# Altium PCB T-LOG v2.0.PcbDoc
Units mm, origin at the board's own origin, x right, y up, seen from the top; angles counter-clockwise.
Board outline 11.25 x 14.5 mm, 2 copper layers (TOP, BOTTOM), stack 0.136 mm thick; 18 components, 13 nets, 68 pads, 31 vias.
Unrouted connection lines stored in the file: 1.
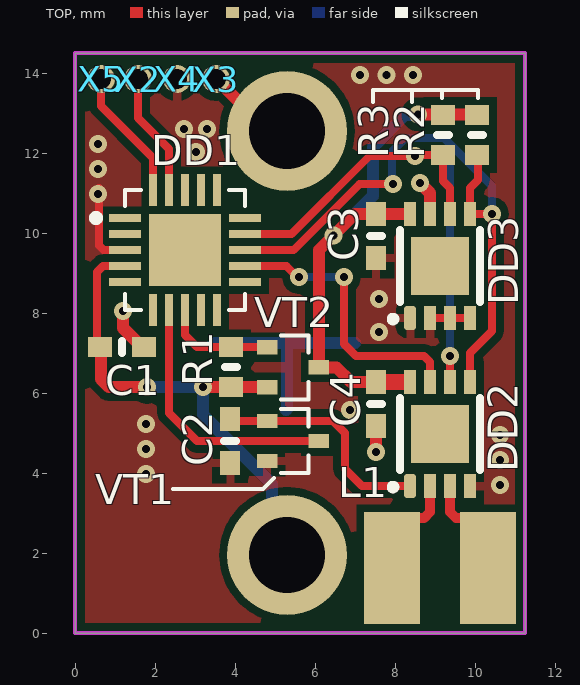
[diagram p0: TOP view]
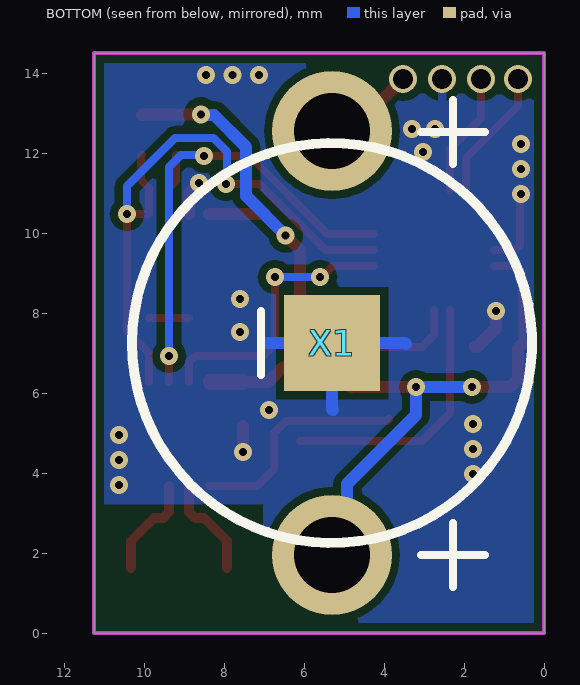
[diagram p1: BOTTOM view, seen from below]
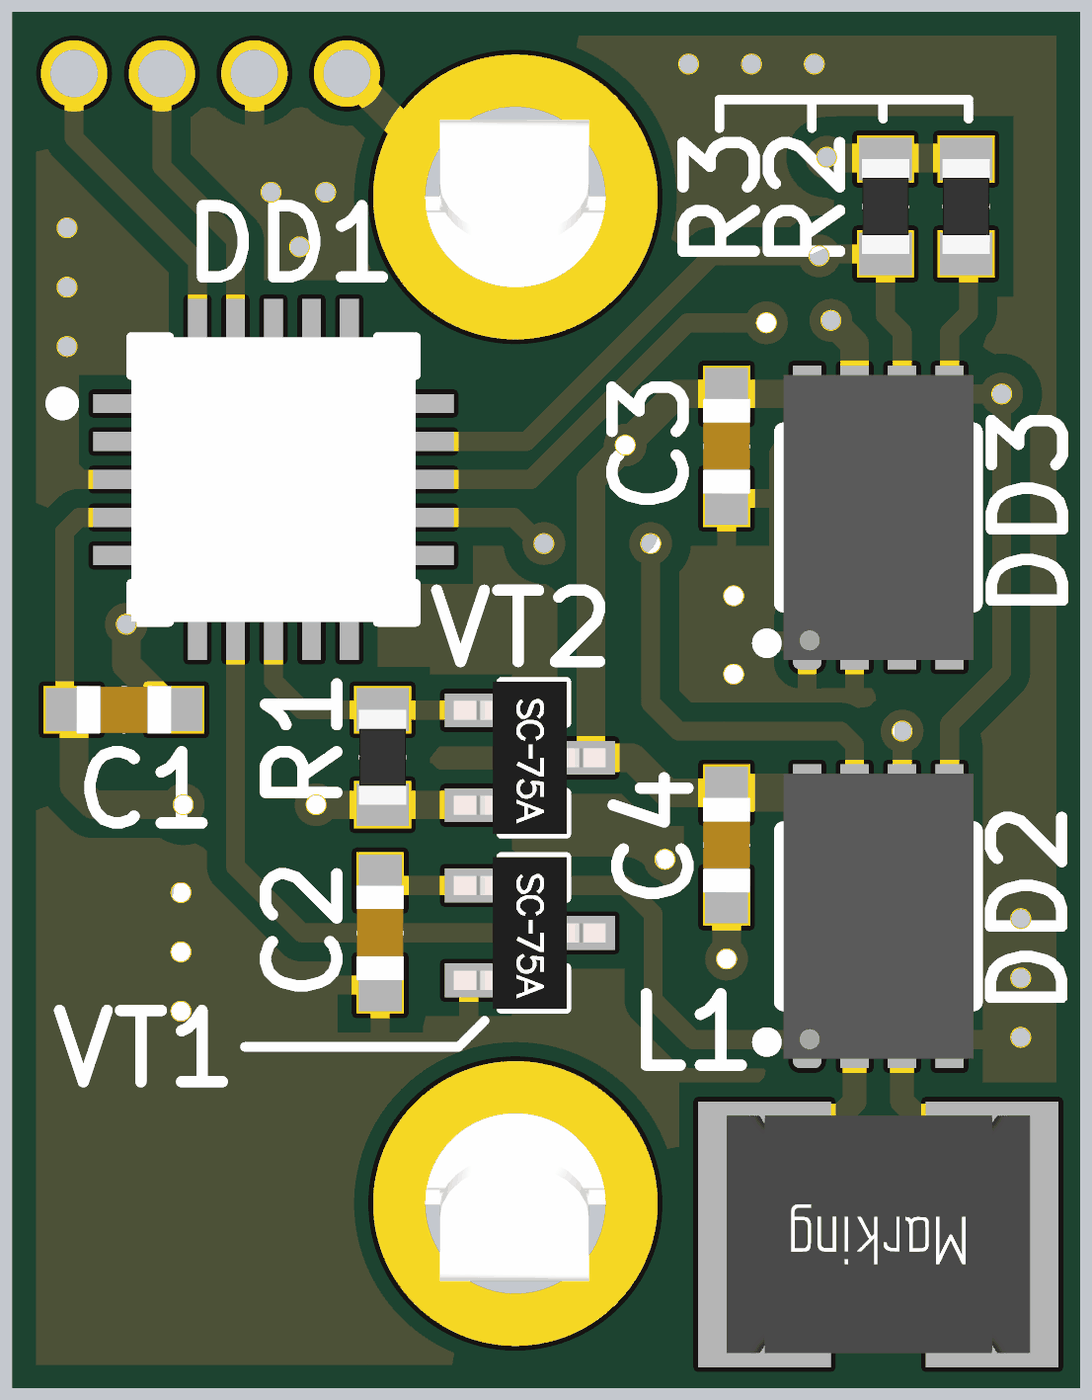
[diagram p2: 3D render of the assembled board from above, using the file's embedded part models]

## Layer stack, top to bottom
TopMask: solder mask 0.01, Solder Resist, Dk 3.5
TOP: signal copper 0.018
Dielectric 1: core 0.1, FR-4, Dk 4.2
BOTTOM: signal copper 0.018
BotMask: solder mask 0.01, Solder Resist, Dk 3.5

## Board outline
0,0 0,14.5 11.25,14.5 11.25,0

## Design rules (kind name [scope] priority, off if disabled: settings)
Clearance ClearancePOLY [InPoly] p1: gap=0.2 ignorepadtopadclearanceinfootprint=FALSE
Clearance ClearanceINNER [OnLayer('INNER1') OR OnLayer('INNER2')] p2: gap=0.15 ignorepadtopadclearanceinfootprint=FALSE
Clearance ClearanceTOPandBOTTOM [OnLayer('TOP') OR OnLayer('BOTTOM')] p3: gap=0.12 ignorepadtopadclearanceinfootprint=FALSE
Clearance POLY-BOARD [InPoly vs OnLayer('Keep-Out Layer')] p4: gap=0.5 ignorepadtopadclearanceinfootprint=FALSE
ComponentClearance [All] p1: gap=0 collisioncheckmode=3 verticalgap=0 showdistances=FALSE
DiffPairsRouting [All] p1: maxlimit=0.25 minlimit=0.1 mostfreqgap=0.125 toplayer_minwidth=0.125 toplayer_maxwidth=0.2 toplayer_prefwidth=0.125 bottomlayer_minwidth=0.125 bottomlayer_maxwidth=0.2 bottomlayer_prefwidth=0.125 maxuncoupledlength=5
HoleSize [All] p1: absolutevalues=TRUE maxlimit=5 minlimit=0.2 maxpercent=80.000 minpercent=20.000
HoleToHoleClearance [All] p1: gap=0.1 allowstackedmicrovias=TRUE
MinimumSolderMaskSliver [All] p1: minsoldermaskwidth=0.1
PlaneClearance [All] p1: clearance=0.5
PlaneConnect [All] p1: planeconnectstyle=Relief reliefexpansion=0.5 reliefentries=4 reliefconductorwidth=0.25 reliefairgap=0.25
PolygonConnect PolygonConnect_PAD_ANT [IsPad AND (InComponent('ANT1') OR InComponent('C14'))] p1: connectstyle=Relief reliefconductorwidth=0.2 reliefentries=4 polygonreliefangle="90 Angle" airgapwidth=0.125
PolygonConnect PolygonConnect_PAD [IsPad] p2: connectstyle=Relief reliefconductorwidth=0.2 reliefentries=4 polygonreliefangle="90 Angle" airgapwidth=0.2
PolygonConnect PolygonConnect_VIA [IsVia] p3: connectstyle=Direct reliefconductorwidth=0.254 reliefentries=4 polygonreliefangle="90 Angle" airgapwidth=0.254
RoutingCorners [All] p1: cornerstyle=45-Degree minsetback=1.25 maxsetback=1.25
RoutingVias [All] p1: holewidth=0.2 width=0.45 viastyle="Through Hole" minholewidth=0.2 minwidth=0.45 maxholewidth=0.2 maxwidth=0.5
SilkToSilkClearance [All] p1: silktosilkclearance=0
SilkToSolderMaskClearance [IsPad] p1: minsilkscreentomaskgap=0 clearancetoexposedcopper=TRUE
SolderMaskExpansion [All] p1: expansion=0.05 istentingtop=FALSE
Width WidthTOPandBOTTOM [OnLayer('TOP') OR OnLayer('BOTTOM')] p1: maxlimit=3 minlimit=0.125 preferedwidth=0.15
Width WidthINNER [OnLayer('INNER1') OR OnLayer('INNER2')] p2: maxlimit=3 minlimit=0.2 preferedwidth=0.3
20 further rules are at their usual default settings.

## Components (designator, comment, footprint, x,y, rotation, side; value= is the part's Value field where it differs from the comment)
C1 "100 нФ" C0402 1.175,7.15 r180 top locked
C2 "100 нФ" C0402 3.875,4.8 r90 top locked
C3 "100 нФ" C0402 7.525,9.925 r90 top locked
C4 "100 нФ" C0402 7.525,5.725 r90 top locked
DD1 "ATtiny406-MNR" VQFN20_3x3_0.4 2.75,9.575 r0 top locked
DD2 "M24LR64E-RMC6T" UDFN-8_2X3 9.125,4.975 r90 top locked
DD3 "AT24C64D-MAHM" UDFN-8_2X3 9.125,9.175 r90 top locked
L1 "4,7 мкГн" WE-LQ_1210 9.125,1.625 r180 top locked
R1 "4К7" R0402 3.9,6.65 r270 top locked
R2 "4К7" R0402 10.05,12.45 r90 top
R3 "4К7" R0402 9.2,12.45 r90 top
VT1 "NTA4001NT1G" SC-75 5.451,4.8 r270 top locked
VT2 "NTA4151PT1G" SC-75 5.451,6.644 r270 top locked
X1 "KEYSTONE 3031" KEYSTONE_3031 5.3,7.25 r90 bottom locked
X2 "VIA_0.5x1x2_RECTANGLE" VIA_0.5x1x2_RECTANGLE 1.575,13.85 r180 top locked
X3 "VIA_0.5x1x2_RECTANGLE" VIA_0.5x1x2_RECTANGLE 3.525,13.85 r90 top locked
X4 "VIA_0.5x1x2_RECTANGLE" VIA_0.5x1x2_RECTANGLE 2.55,13.85 r90 top locked
X5 "VIA_0.5x1x2_RECTANGLE" VIA_0.5x1x2_RECTANGLE 0.65,13.85 r90 top locked

## Footprints (in the part's own frame and the unit in brackets; to place one, negate y for a bottom-side part, rotate by r counter-clockwise, add the part's x,y. Pads: shape width x height; smd on the part's side, far side on the other; paste and mask are expansions set on the pad)
C0402 [mm]
  rect 0.6x0.5 smd paste-0.025 mask+0.05: 1(-0.55,0) 2(0.55,0)
  silkscreen extent 0,-0.15 0,0.15, body extent -0.5,-0.25 0.5,0.25, height 0.63
KEYSTONE_3031 [mm]
  round 3 hole 1.9: 1(-5.3,0) 2(5.3,0)
  rect 2.4x2.4 smd paste-0.01 mask+0.075: 3(0,0)
  silkscreen extent -6.1,-5 6.07,5, body extent -6.12,-4.59 6.12,4, height 3.05
R0402 [mm]
  rect 0.5x0.6 smd paste-0.025 mask+0.05: 1(-0.5,0) 2(0.5,0)
  silkscreen extent 0,-0.15 0,0.15, body extent -0.5,-0.25 0.5,0.25, height 0.3
SC-75 [mil]
  rect 14.02x20 smd paste+0 mask+1.97: 1(-19.69,-25.33) 2(19.69,-25.33) 3(0,25.33)
  silkscreen extent -31,-12 31,15, body extent -31,-31 31,31, height 28
UDFN-8_2X3 [mm]
  rrect50% 0.6x0.3 smd paste+0 mask+0.05: 1(-1.3,0.75)
  rect 0.6x0.3 smd paste+0 mask+0.05: 2(-1.3,0.25) 3(-1.3,-0.25) 4(-1.3,-0.75) 5(1.3,-0.75) 6(1.3,-0.25) 7(1.3,0.25) 8(1.3,0.75)
  rect 1.46x1.46 smd paste-0.04 mask+0.05: 9(0,0)
  silkscreen extent -1.38,-1 0.9,1.23, body extent -1.5,-1 1.5,1, height 0.53
VIA_0.5x1x2_RECTANGLE [mm]
  round 0.7 hole 0.5 paste-0.1 mask+0.05: 1(0,0)
VQFN20_3x3_0.4 [mm]
  rect 0.8x0.2 smd paste+0 mask+0.05: 1(-1.5,0.8) 2(-1.5,0.4) 3(-1.5,0) 4(-1.5,-0.4) 5(-1.5,-0.8) 11(1.5,-0.8) 12(1.5,-0.4) 13(1.5,0) 14(1.5,0.4) 15(1.5,0.8)
  rect 0.2x0.8 smd paste+0 mask+0.05: 6(-0.8,-1.5) 7(-0.4,-1.5) 8(0,-1.5) 9(0.4,-1.5) 10(0.8,-1.5) 16(0.8,1.5) 17(0.4,1.5) 18(0,1.5) 19(-0.4,1.5) 20(-0.8,1.5)
  rect 1.8x1.8 smd paste-0.05 mask+0.05: 21(0,0)
  silkscreen extent -2.27,-1.5 1.5,1.5, body extent -1.5,-1.5 1.5,1.5, height 0.76
WE-LQ_1210 [mm] "SMT Inductor, body 3.2x2.5mm"
  rect 1.4x2.8 smd paste+0 mask+0.05: 1(-1.2,0) 2(1.2,0)
  body extent -1.6,-1.25 1.6,1.25, height 1.99

## Part data
C1 C2 C3 C4: library part C0402, "Чип-конденсатор 0,1 мкФ 50 В 0402", TYPE="Чип-конденсатор 0402"
DD1: "Микроконтроллер AVR ATtiny406-MNR VQFN20"
DD2: "Память EEPROM I2C/NFC 64Кбит M24LR64E-RMC6T UFDFN8 ST"
DD3: "Память EEPROM I2C 64 Кбит AT24C64D‑MAHM UDFN8"
L1: library part WE-LQ_744032004, "Чип-индуктивность WE-LQ 744032004 4,7 мкГн 0,49 А Wurth Elektronik", TYPE=LQM2HPN2R2MJ0
R1 R2 R3: library part R0402, "Чип-резистор 4,7 кОм 5% 0402", TYPE="Чип-резистор 0402"
VT1: "Транзистор MOSFET N-Channel NTA4001NT1G"
VT2: "Транзистор MOSFET P-Channel NTA4151PT1G"
X1: library part KEYSTONE_3031, "Держатель элемента CR1025 KEYSTONE 3031"

## Via types
v1: diameter 0.45, hole 0.2, TOP to BOTTOM, tented both sides, 31 vias

## Nets (pads, with @x,y where several pads share a name; then routed paths per layer and width w, separated by ;. In a path a pad name is that pad's centre, name@x,y a point inside that pad or via, vN(x,y) a via of type N, cw(c..) or ccw(c..) an arc to the next point about the centre after c; other vN are vias at no path point)
ANT0: DD2.2 L1.2 | length 2.6
  TOP w0.25: L1.2 7.925,2.304 8.5,2.879 8.729,2.879 8.875,3.025 DD2.2
ANT1: DD2.3 L1.1 | length 2.6
  TOP w0.25: DD2.3 9.375,3.025 9.521,2.879 9.75,2.879 10.325,2.304 L1.1
GND: C1.1 C2.1 C3.1 C4.1 DD1.3 DD2.4 DD3.1 DD3.2 DD3.3 DD3.4 DD3.7 VT1.2 X1.3 X4.1 | length 11.1
  TOP w0.2: v1@0.6,11.125 0.6,9.692 0.717,9.575 DD1.3 ; DD3.2 DD3.3 DD3.4
  TOP w0.3: v1(1.2,8.05) 1.2,7.625 1.675,7.15 C1.1 ; v1(7.525,4.525) C4.1 ; v1(8.625,11.25) 8.875,11 DD3.7
  BOTTOM w0.3: 3.45,7.225 3.475,7.25 X1.3 ; 5.275,5.575 5.3,5.6 X1.3 ; 7,7.25 X1.3
  other v1: 10.625,3.7 1.775,3.975 10.625,4.325 1.775,4.6 10.625,4.95 1.775,5.225 6.875,5.575 7.6,7.525 7.6,8.35 0.575,10.975 0.575,11.6 3.025,12.025 0.575,12.225 2.725,12.6 3.3,12.6 7.125,13.95 7.788,13.95 8.45,13.95
I2C_SCL: DD1.14 DD2.6 DD3.6 R3.1 | length 13.8
  TOP w0.2: DD1.14 5.414,9.975 7.369,11.93 v1(8.5,11.93) ; v1@8.5,11.95 R3.1 9.2,11.3 9.375,11.125 DD3.6 ; DD2.6 v1(9.375,6.925) v1@9.375,7.05
  BOTTOM w0.2: v1(8.5,11.93) 8.52,11.95 9.075,11.95 9.375,11.65 v1(9.375,6.925)
I2C_SDA: DD1.13 DD2.5 DD3.5 R2.1 | length 15.6
  TOP w0.2: DD1.13 5.467,9.575 7.117,11.225 v1(7.945,11.225) ; DD2.5 9.875,7 10.425,7.55 v1(10.425,10.475) DD3.5 9.875,11.125 10.075,11.325 10.075,11.925 R2.1
  BOTTOM w0.2: v1(7.945,11.225) 7.925,11.245 7.925,12.04 8.26,12.375 9.225,12.375 10.425,11.175 v1(10.425,10.475)
NFC_WAKEUP: DD1.7 VT1.3 | length 6.6
  TOP w0.2: DD1.7 2.35,5.5 3.05,4.8 VT1.3
PWR_HARVEST: C2.2 DD2.1 VT1.1 | length 5.7
  TOP w0.2: C2.2 3.925,5.3 VT1.1 6.45,5.3 6.75,5 6.75,4.1 7.175,3.675 DD2.1
PWR_MEM: DD1.8 R1.1 VT2.1 | length 2.8
  TOP w0.2: DD1.8 2.75,7.45 3.05,7.15 R1.1 3.903,7.147 4.805,7.147 VT2.1
RF_ACTION: DD1.12 DD2.7 | length 7.1
  TOP w0.2: DD1.12 5.282,9.175 5.557,8.9 v1(5.6,8.9) ; v1(6.725,8.9) 6.725,7.225 7.025,6.925 8.725,6.925 8.875,6.775 DD2.7
  BOTTOM w0.2: v1(5.6,8.9) v1(6.725,8.9)
TEST: DD1.20 X5.1 | length 3.3
  TOP w0.2: X5.1 0.65,13.175 1.95,11.875 DD1.20
UPDI: DD1.19 X2.1 | length 3.1
  TOP w0.2: X2.1 1.575,12.875 2.35,12.1 DD1.19
VCC_BAT: C1.2 DD1.4 R1.2 VT2.2 X1.1 X1.2 X3.1 | length 15.8
  TOP w0.2: C1.2@0.55,7.225 0.55,9.025 0.7,9.175 DD1.4
  TOP w0.3: C1.2@0.55,7.225 C1.2 0.65,7.125 0.65,6.35 0.85,6.15 v1(1.8,6.15) ; v1(3.2,6.15) 3.203,6.147 4.805,6.147 VT2.2 ; X3.1 X3.1@3.633,13.85 ; X3.1@3.633,13.75 X1.2@4.933,12.45 ; X1.1@4.783,2.467 X1.1 ; X1.2@4.933,12.55 X1.2
  BOTTOM w0.3: v1(1.8,6.15) v1(3.2,6.15) 3.2,5.45 4.926,3.724 4.926,2.324 X1.1
VCC_MEM: C3.2 C4.2 DD2.8 DD3.8 R2.2 R3.2 VT2.3 | length 13.6
  TOP w0.3: v1@6.429,9.906 6.998,10.475 C3.2 DD3.8 ; v1@6.436,9.936 v1(6.457,9.936) 6.095,9.574 VT2.3 6.531,6.644 6.9,6.275 C4.2 ; v1(8.581,12.969) 8.59,12.959 10.041,12.959 R2.2
  TOP w0.4: C4.2 DD2.8@8.325,6.275
  BOTTOM w0.3: v1(6.457,9.936) 7.45,10.929 7.45,12.15 8.247,12.947 8.559,12.947 v1(8.581,12.969)
pads on no net: DD1.1 DD1.2 DD1.5 DD1.6 DD1.9 DD1.10 DD1.11 DD1.15 DD1.16 DD1.17 DD1.18 DD1.21 DD2.9 DD3.9

## Polygon pours and split planes (outlines as drawn)
GND on BOTTOM "GND_L02_P004" (solid, remove dead copper, pour order 4): 0,14.5 11.25,14.5 11.25,0 0,0
no net on BOTTOM "NONET_L02_P001" (solid, remove dead copper, pour order 1): 0,14.5
GND on TOP "GND_L01_P005" (solid, remove dead copper, pour order 5): 0,14.5 11.25,14.5 11.25,0 0,0

## Keep-outs
Keep-Out Layer:
  the board outline again, w0.1

## Other copper
BOTTOM:
  pour cut-out: 11.25,3.225 7.025,3.225 7.025,0 11.25,0
  pour cut-out: 11.25,0

## Silkscreen, mask and mechanical layers (free items; w line width, h text height)
TopSilk:
  lines w0.1: 2.45,3.6 4.7,3.6 4.975,3.875 ; 7.45,13.275 7.45,13.575 10.075,13.575 10.075,13.375 ; 8.425,13.275 8.425,13.575 ; 9.175,13.375 9.175,13.575